# EAGLE board 6up-PA1 (EAGLE 9.4.2)
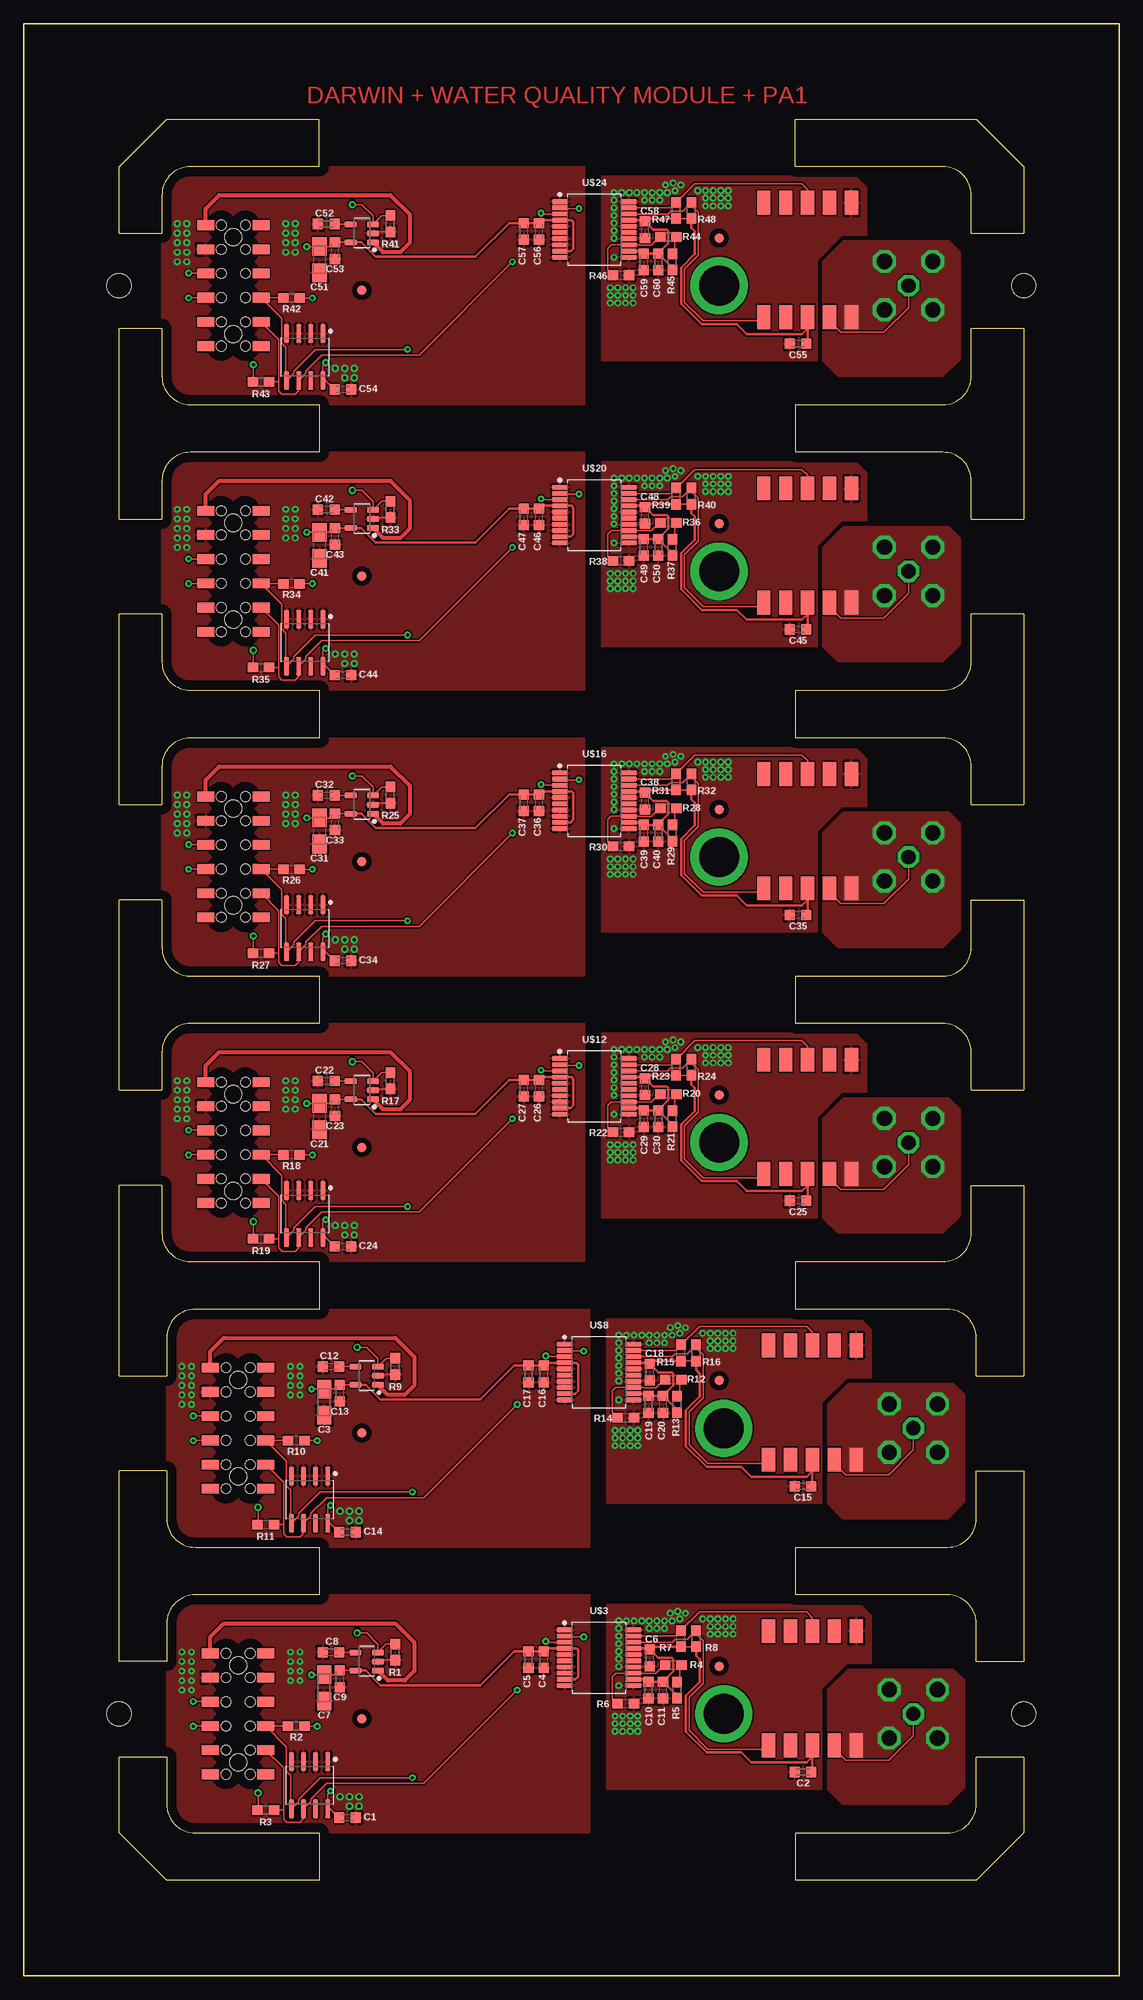
[diagram p0: board, top side]
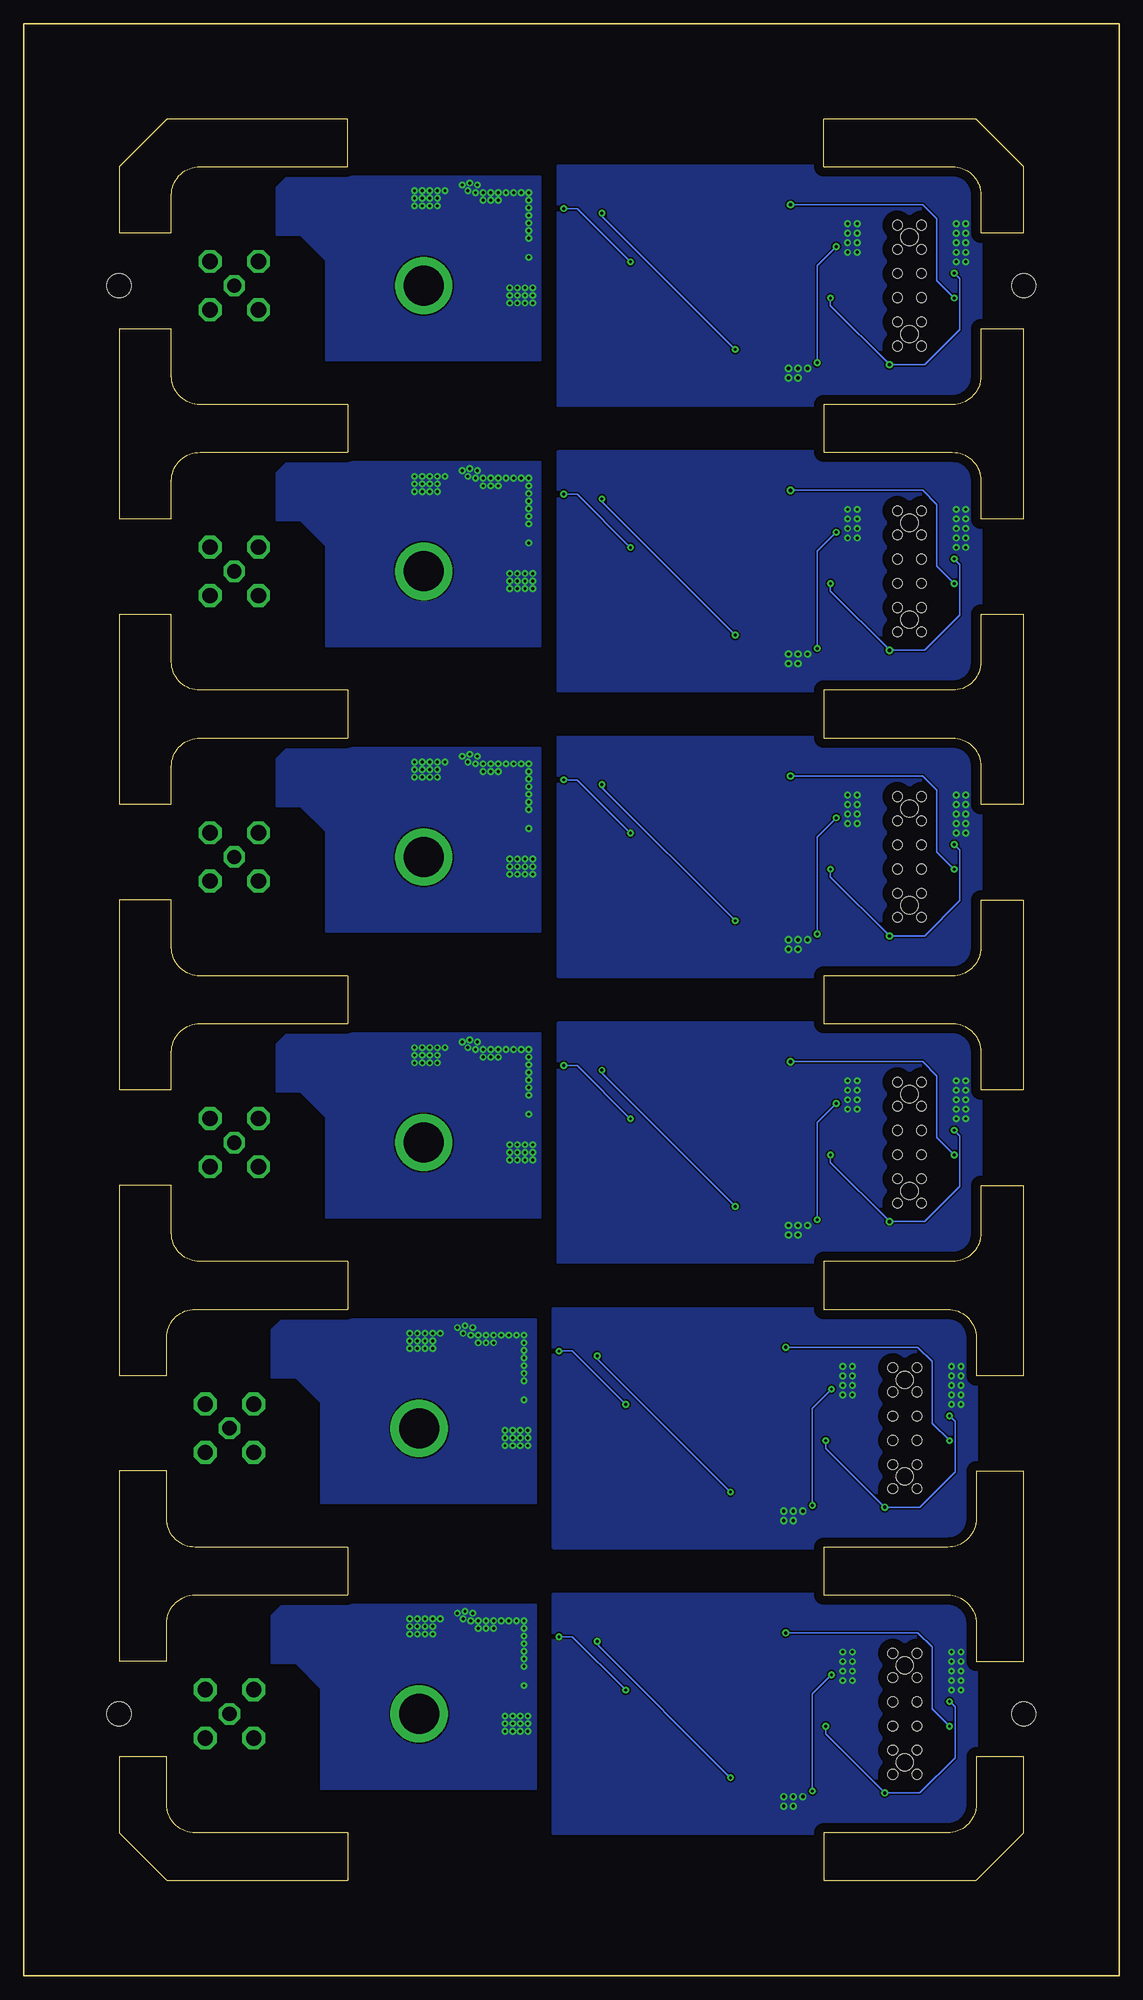
[diagram p1: board, bottom side, seen from below]

Size 115 x 205 mm. Coordinates in mm from the lower left corner, seen from the top.
Outline: 81,10 100,10 105,15 105,23 100,23 100,18 arc-90 97,15 81,15 81,10
Outline: 81,10 81,10
Outline: 15,18 arc90 18,15 31,15 31,10 15,10 10,15 10,23 15,23 15,18
Outline: 100,37 arc90 97,40 81,40 81,45 97,45 arc90 100,48 100,53 105,53 105,33 100,33 100,37
Outline: 18,40 arc90 15,37 15,33 10,33 10,53 15,53 15,48 arc90 18,45 31,45 31,40 18,40
Outline: 100,67 arc90 97,70 81,70 81,75 96.5,75 arc90 99.5,78 99.5,83 105,83 105,63 100,63 100,67
Outline: 18,70 arc90 15,67 15,63 10,63 10,83 14.5,83 14.5,78 arc90 17.5,75 31,75 31,70 18,70
Outline: 99.5,97 arc90 96.5,100 81,100 81,105 96.5,105 arc90 99.5,108 99.5,113 105,113 105,93 99.5,93 99.5,97
Outline: 17.5,100 arc90 14.5,97 14.5,93 10,93 10,113 14.5,113 14.5,108 arc90 17.5,105 31,105 31,100 17.5,100
Outline: 99.5,127 arc90 96.5,130 81,130 81,135 96.5,135 arc90 99.5,138 99.5,143 105,143 105,123 99.5,123 99.5,127
Outline: 17.5,130 arc90 14.5,127 14.5,123 10,123 10,143 14.5,143 14.5,138 arc90 17.5,135 31,135 31,130 17.5,130
Outline: 99.5,157 arc90 96.5,160 81,160 81,165 96.5,165 arc90 99.5,168 99.5,173 105,173 105,153 99.5,153 99.5,157
Outline: 17.5,160 arc90 14.5,157 14.5,153 10,153 10,173 14.5,173 14.5,168 arc90 17.5,165 31,165 31,160 17.5,160
Outline: 99.5,187 arc90 96.5,190 81,190 81,195 100,195 105,190 105,183 99.5,183 99.5,187
Outline: 17.5,190 arc90 14.5,187 14.5,183 10,183 10,190 15,195 31,195 31,190 17.5,190
Outline: 0,0 115,0 115,205 0,205 0,0
Copper layers (1*16): Top 0.035mm / dielectric 1.5mm / Bottom 0.035mm
Design rules "default *": minimum track width 6mil, minimum drill 0.35mm, track to track 6mil, track to pad 6mil, pad to pad 6mil, via to via 6mil, smd to smd 6mil, copper to edge 40mil, drill to drill 6mil, minimum pad ring 10mil, minimum via ring 8mil, stop-mask expansion 4mil, vias tented up to drill 0.35mm, thermal gap 10mil
Holes 2.54 mm at 10,177.5 105,177.5 10,27.5 105,27.5

## Footprints (pad centres in the part's own frame; a part is rotated, then mirrored left to right if it is on the bottom)
C0603K = smd 1.05 x 1.08: 1 -0.875,0; 2 0.875,0
A/3216-18R = smd 1.95 x 1.5: + 1.375,0; - -1.375,0
FIDUCIAL_1MM = smd 1 x 1: 1 0,0
M20-7810645 = smd 1.02 x 1.78: P$1 -6.35,-2.91; P$2 -3.81,-2.91; P$3 -1.27,-2.91; P$4 1.27,-2.91; P$5 3.81,-2.91; P$6 6.35,-2.91; P$7 6.35,2.91; P$8 3.81,2.91; P$9 1.27,2.91; P$10 -1.27,2.91; P$11 -3.81,2.91; P$12 -6.35,2.91 | hole 1.02: -6.35,1.27; -3.81,1.27; -1.27,1.27; 1.27,1.27; 3.81,1.27; 6.35,1.27; 6.35,-1.27; 3.81,-1.27; 1.27,-1.27; -1.27,-1.27; -3.81,-1.27; -6.35,-1.27 | hole 1.8: -5.08,0; 5.08,0
0603 = smd 1.1 x 1: 1 -0.85,0; 2 0.85,0
SOIC127P600X175-8 = smd 1.968 x 0.569: 1 -2.473,1.905; 2 -2.473,0.635; 3 -2.473,-0.635; 4 -2.473,-1.905; 5 2.473,-1.905; 6 2.473,-0.635; 7 2.473,0.635; 8 2.473,1.905
5-1814832-1 = drill 1.6 octagon: G1 -2.54,2.54; G2 -2.54,-2.54; G3 2.54,-2.54; G4 2.54,2.54 | drill 1.5 octagon: PIN 0,0
ATLAS-10P = smd 2.5 x 1.4: PAD1 -6,5; PAD2 -6,2.7; PAD3 -6,0.4; PAD4 -6,-1.9; PAD5 -6,-4.2; PAD6 6,-4.2; PAD7 6,-1.9; PAD8 6,0.4; PAD9 6,2.7; PAD10 6,5
SOP65P780X200-20 = smd 1.702 x 0.475: 1 -3.603,2.925; 2 -3.603,2.275; 3 -3.603,1.625; 4 -3.603,0.975; 5 -3.603,0.325; 6 -3.603,-0.325; 7 -3.603,-0.975; 8 -3.603,-1.625; 9 -3.603,-2.275; 10 -3.603,-2.925; 11 3.603,-2.925; 12 3.603,-2.275; 13 3.603,-1.625; 14 3.603,-0.975; 15 3.603,-0.325; 16 3.603,0.325; 17 3.603,0.975; 18 3.603,1.625; 19 3.603,2.275; 20 3.603,2.925
SOT95P280X145-5 = smd 1.262 x 0.609: 1 -1.175,0.95; 2 -1.175,0; 3 -1.175,-0.95; 4 1.175,-0.95; 5 1.175,0.95

## Placement (x,y rotation side)
C1  .1uf  [C0603K]  34,16.6 0 top
C2  .1uf  [C0603K]  81.8,21.4 180 top
C3  6.8uf  [A/3216-18R]  31.54,60.23 90 top
C4  .1uf  [C0603K]  54.6,33.2 270 top
C5  10uf  [C0603K]  53,33.2 270 top
C6  .1uf  [C0603K]  65.73,33.38 270 top
C7  6.8uf  [A/3216-18R]  31.54,30.23 90 top
C8  [C0603K]  32.25,33.97 180 top
C9  .1uf  [C0603K]  33.17,31.18 270 top
C10  .1uf  [C0603K]  65.6,30 270 top
C11  10uf  [C0603K]  67.13,30 270 top
C12  [C0603K]  32.25,63.97 180 top
C13  .1uf  [C0603K]  33.17,61.17 270 top
C14  .1uf  [C0603K]  34,46.6 0 top
C15  .1uf  [C0603K]  81.8,51.4 180 top
C16  .1uf  [C0603K]  54.6,63.2 270 top
C17  10uf  [C0603K]  53,63.2 270 top
C18  .1uf  [C0603K]  65.73,63.38 270 top
C19  .1uf  [C0603K]  65.6,60 270 top
C20  10uf  [C0603K]  67.13,60 270 top
C21  6.8uf  [A/3216-18R]  31.04,90.23 90 top
C22  [C0603K]  31.75,93.97 180 top
C23  .1uf  [C0603K]  32.67,91.17 270 top
C24  .1uf  [C0603K]  33.5,76.6 0 top
C25  .1uf  [C0603K]  81.3,81.4 180 top
C26  .1uf  [C0603K]  54.1,93.2 270 top
C27  10uf  [C0603K]  52.5,93.2 270 top
C28  .1uf  [C0603K]  65.23,93.38 270 top
C29  .1uf  [C0603K]  65.1,90 270 top
C30  10uf  [C0603K]  66.63,90 270 top
C31  6.8uf  [A/3216-18R]  31.04,120.23 90 top
C32  [C0603K]  31.75,123.97 180 top
C33  .1uf  [C0603K]  32.67,121.17 270 top
C34  .1uf  [C0603K]  33.5,106.6 0 top
C35  .1uf  [C0603K]  81.3,111.4 180 top
C36  .1uf  [C0603K]  54.1,123.2 270 top
C37  10uf  [C0603K]  52.5,123.2 270 top
C38  .1uf  [C0603K]  65.23,123.38 270 top
C39  .1uf  [C0603K]  65.1,120 270 top
C40  10uf  [C0603K]  66.63,120 270 top
C41  6.8uf  [A/3216-18R]  31.04,150.23 90 top
C42  [C0603K]  31.75,153.97 180 top
C43  .1uf  [C0603K]  32.67,151.18 270 top
C44  .1uf  [C0603K]  33.5,136.6 0 top
C45  .1uf  [C0603K]  81.3,141.4 180 top
C46  .1uf  [C0603K]  54.1,153.2 270 top
C47  10uf  [C0603K]  52.5,153.2 270 top
C48  .1uf  [C0603K]  65.23,153.38 270 top
C49  .1uf  [C0603K]  65.1,150 270 top
C50  10uf  [C0603K]  66.63,150 270 top
C51  6.8uf  [A/3216-18R]  31.04,180.23 90 top
C52  [C0603K]  31.75,183.97 180 top
C53  .1uf  [C0603K]  32.67,181.18 270 top
C54  .1uf  [C0603K]  33.5,166.6 0 top
C55  .1uf  [C0603K]  81.3,171.4 180 top
C56  .1uf  [C0603K]  54.1,183.2 270 top
C57  10uf  [C0603K]  52.5,183.2 270 top
C58  .1uf  [C0603K]  65.23,183.38 270 top
C59  .1uf  [C0603K]  65.1,180 270 top
C60  10uf  [C0603K]  66.63,180 270 top
E$1  [FIDUCIAL_1MM]  35.5,177 0 top
E$2  [FIDUCIAL_1MM]  35.5,147 0 top
E$3  [FIDUCIAL_1MM]  73,182.5 0 top
E$4  [FIDUCIAL_1MM]  73,152.5 0 top
E$5  [FIDUCIAL_1MM]  35.5,117 0 top
E$6  [FIDUCIAL_1MM]  35.5,87 0 top
E$7  [FIDUCIAL_1MM]  35.5,57 0 top
E$8  [FIDUCIAL_1MM]  35.5,27 0 top
E$9  [FIDUCIAL_1MM]  73,122.5 0 top
E$10  [FIDUCIAL_1MM]  73,92.5 0 top
E$11  [FIDUCIAL_1MM]  73,62.5 0 top
E$12  [FIDUCIAL_1MM]  73,32.5 0 top
J1  2X6-HEADERS  [M20-7810645]  22.5,27.5 90 top
J2  2X6-HEADERS  [M20-7810645]  22.5,57.5 90 top
J3  2X6-HEADERS  [M20-7810645]  22,87.5 90 top
J4  2X6-HEADERS  [M20-7810645]  22,117.5 90 top
J5  2X6-HEADERS  [M20-7810645]  22,147.5 90 top
J6  2X6-HEADERS  [M20-7810645]  22,177.5 90 top
R1  100k  [0603]  39,34 90 top
R2  4.7k  [0603]  28.6,26.2 180 top
R3  4.7k  [0603]  25.4,17.4 0 top
R4  1.5k  [0603]  68.2,32.6 180 top
R5  1.5k  [0603]  68.6,30 90 top
R6  1.5k  [0603]  63.2,28.6 0 top
R7  4.7k  [0603]  69,35.4 90 top
R8  4.7k  [0603]  70.6,35.4 90 top
R9  100k  [0603]  39,64 90 top
R10  4.7k  [0603]  28.6,56.2 180 top
R11  4.7k  [0603]  25.4,47.4 0 top
R12  1.5k  [0603]  68.2,62.6 180 top
R13  1.5k  [0603]  68.6,60 90 top
R14  1.5k  [0603]  63.2,58.6 0 top
R15  4.7k  [0603]  69,65.4 90 top
R16  4.7k  [0603]  70.6,65.4 90 top
R17  100k  [0603]  38.5,94 90 top
R18  4.7k  [0603]  28.1,86.2 180 top
R19  4.7k  [0603]  24.9,77.4 0 top
R20  1.5k  [0603]  67.7,92.6 180 top
R21  1.5k  [0603]  68.1,90 90 top
R22  1.5k  [0603]  62.7,88.6 0 top
R23  4.7k  [0603]  68.5,95.4 90 top
R24  4.7k  [0603]  70.1,95.4 90 top
R25  100k  [0603]  38.5,124 90 top
R26  4.7k  [0603]  28.1,116.2 180 top
R27  4.7k  [0603]  24.9,107.4 0 top
R28  1.5k  [0603]  67.7,122.6 180 top
R29  1.5k  [0603]  68.1,120 90 top
R30  1.5k  [0603]  62.7,118.6 0 top
R31  4.7k  [0603]  68.5,125.4 90 top
R32  4.7k  [0603]  70.1,125.4 90 top
R33  100k  [0603]  38.5,154 90 top
R34  4.7k  [0603]  28.1,146.2 180 top
R35  4.7k  [0603]  24.9,137.4 0 top
R36  1.5k  [0603]  67.7,152.6 180 top
R37  1.5k  [0603]  68.1,150 90 top
R38  1.5k  [0603]  62.7,148.6 0 top
R39  4.7k  [0603]  68.5,155.4 90 top
R40  4.7k  [0603]  70.1,155.4 90 top
R41  100k  [0603]  38.5,184 90 top
R42  4.7k  [0603]  28.1,176.2 180 top
R43  4.7k  [0603]  24.9,167.4 0 top
R44  1.5k  [0603]  67.7,182.6 180 top
R45  1.5k  [0603]  68.1,180 90 top
R46  1.5k  [0603]  62.7,178.6 0 top
R47  4.7k  [0603]  68.5,185.4 90 top
R48  4.7k  [0603]  70.1,185.4 90 top
U1  M24C02-WMN6TP  [SOIC127P600X175-8]  30,50 270 top
U2  M24C02-WMN6TP  [SOIC127P600X175-8]  29.5,80 270 top
U3  M24C02-WMN6TP  [SOIC127P600X175-8]  30,20 270 top
U4  M24C02-WMN6TP  [SOIC127P600X175-8]  29.5,110 270 top
U5  M24C02-WMN6TP  [SOIC127P600X175-8]  29.5,140 270 top
U6  M24C02-WMN6TP  [SOIC127P600X175-8]  29.5,170 270 top
U$1  5-1814832-1  [5-1814832-1]  93.4,27.5 0 top
U$2  ATLAS10P  [ATLAS-10P]  83.2,30.2 90 top
U$3  ADM3260  [SOP65P780X200-20]  60.4,33.4 0 top
U$4  MIC5219-3.3YM5-TR  [SOT95P280X145-5]  36,33 180 top
U$5  MIC5219-3.3YM5-TR  [SOT95P280X145-5]  36,63 180 top
U$6  5-1814832-1  [5-1814832-1]  93.4,57.5 0 top
U$7  ATLAS10P  [ATLAS-10P]  83.2,60.2 90 top
U$8  ADM3260  [SOP65P780X200-20]  60.4,63.4 0 top
U$9  MIC5219-3.3YM5-TR  [SOT95P280X145-5]  35.5,93 180 top
U$10  5-1814832-1  [5-1814832-1]  92.9,87.5 0 top
U$11  ATLAS10P  [ATLAS-10P]  82.7,90.2 90 top
U$12  ADM3260  [SOP65P780X200-20]  59.9,93.4 0 top
U$13  MIC5219-3.3YM5-TR  [SOT95P280X145-5]  35.5,123 180 top
U$14  5-1814832-1  [5-1814832-1]  92.9,117.5 0 top
U$15  ATLAS10P  [ATLAS-10P]  82.7,120.2 90 top
U$16  ADM3260  [SOP65P780X200-20]  59.9,123.4 0 top
U$17  MIC5219-3.3YM5-TR  [SOT95P280X145-5]  35.5,153 180 top
U$18  5-1814832-1  [5-1814832-1]  92.9,147.5 0 top
U$19  ATLAS10P  [ATLAS-10P]  82.7,150.2 90 top
U$20  ADM3260  [SOP65P780X200-20]  59.9,153.4 0 top
U$21  MIC5219-3.3YM5-TR  [SOT95P280X145-5]  35.5,183 180 top
U$22  5-1814832-1  [5-1814832-1]  92.9,177.5 0 top
U$23  ATLAS10P  [ATLAS-10P]  82.7,180.2 90 top
U$24  ADM3260  [SOP65P780X200-20]  59.9,183.4 0 top

## Library data of the parts
C1-C60 = rcl; SPICEPREFIX: C
E$1-E$12 = microbuilder
J1-J6 U1-U6 U$1-U$24 = Conservify
R1-R48 = SparkFun-Resistors; PROD_ID: RES-07828

## Nets
3V1: C3.+ C13.1 C14.1 C16.1 C17.1 U1.8 U$5.5 U$8.4 U$8.9
3V2: C21.+ C23.1 C24.1 C26.1 C27.1 U2.8 U$9.5 U$12.4 U$12.9
3V3: C1.1 C4.1 C5.1 C7.+ C9.1 U3.8 U$3.4 U$3.9 U$4.5
3V4: C31.+ C33.1 C34.1 C36.1 C37.1 U4.8 U$13.5 U$16.4 U$16.9
3V5: C41.+ C43.1 C44.1 C46.1 C47.1 U5.8 U$17.5 U$20.4 U$20.9
3V6: C51.+ C53.1 C54.1 C56.1 C57.1 U6.8 U$21.5 U$24.4 U$24.9
ENABLE: J1.P$10 R1.2 U$4.3
ENABLE1: J2.P$10 R9.2 U$5.3
ENABLE2: J3.P$10 R17.2 U$9.3
ENABLE3: J4.P$10 R25.2 U$13.3
ENABLE4: J5.P$10 R33.2 U$17.3
ENABLE5: J6.P$10 R41.2 U$21.3
G1: J1.P$11
G2: J1.P$12
G3: J2.P$11
G4: J2.P$12
G5: J3.P$11
G6: J3.P$12
G7: J4.P$11
G8: J4.P$12
G9: J5.P$11
G10: J5.P$12
G11: J6.P$11
G12: J6.P$12
GND: C1.2 C4.2 C5.2 C7.- C8.2 C9.2 J1.P$8 R1.1 U3.1 U3.2 U3.3 U3.4 U$3.1 U$3.5 U$3.7 U$3.8 U$3.10 U$4.2
GND1: C3.- C12.2 C13.2 C14.2 C16.2 C17.2 J2.P$8 R9.1 U1.1 U1.2 U1.3 U1.4 U$5.2 U$8.1 U$8.5 U$8.7 U$8.8 U$8.10
GND2: C21.- C22.2 C23.2 C24.2 C26.2 C27.2 J3.P$8 R17.1 U2.1 U2.2 U2.3 U2.4 U$9.2 U$12.1 U$12.5 U$12.7 U$12.8 U$12.10
GND3: C31.- C32.2 C33.2 C34.2 C36.2 C37.2 J4.P$8 R25.1 U4.1 U4.2 U4.3 U4.4 U$13.2 U$16.1 U$16.5 U$16.7 U$16.8 U$16.10
GND4: C41.- C42.2 C43.2 C44.2 C46.2 C47.2 J5.P$8 R33.1 U5.1 U5.2 U5.3 U5.4 U$17.2 U$20.1 U$20.5 U$20.7 U$20.8 U$20.10
GND5: C51.- C52.2 C53.2 C54.2 C56.2 C57.2 J6.P$8 R41.1 U6.1 U6.2 U6.3 U6.4 U$21.2 U$24.1 U$24.5 U$24.7 U$24.8 U$24.10
I3V1: C15.1 C18.1 C19.1 C20.1 R13.1 R15.1 R16.1 U$7.PAD3 U$8.12 U$8.17
I3V2: C25.1 C28.1 C29.1 C30.1 R21.1 R23.1 R24.1 U$11.PAD3 U$12.12 U$12.17
I3V3: C2.1 C6.1 C10.1 C11.1 R5.1 R7.1 R8.1 U$2.PAD3 U$3.12 U$3.17
I3V4: C35.1 C38.1 C39.1 C40.1 R29.1 R31.1 R32.1 U$15.PAD3 U$16.12 U$16.17
I3V5: C45.1 C48.1 C49.1 C50.1 R37.1 R39.1 R40.1 U$19.PAD3 U$20.12 U$20.17
I3V6: C55.1 C58.1 C59.1 C60.1 R45.1 R47.1 R48.1 U$23.PAD3 U$24.12 U$24.17
IGND: C2.2 C6.2 C10.2 C11.2 R6.2 U$2.PAD6 U$3.11 U$3.14 U$3.16 U$3.20
IGND1: C15.2 C18.2 C19.2 C20.2 R14.2 U$7.PAD6 U$8.11 U$8.14 U$8.16 U$8.20
IGND2: C25.2 C28.2 C29.2 C30.2 R22.2 U$11.PAD6 U$12.11 U$12.14 U$12.16 U$12.20
IGND3: C35.2 C38.2 C39.2 C40.2 R30.2 U$15.PAD6 U$16.11 U$16.14 U$16.16 U$16.20
IGND4: C45.2 C48.2 C49.2 C50.2 R38.2 U$19.PAD6 U$20.11 U$20.14 U$20.16 U$20.20
IGND5: C55.2 C58.2 C59.2 C60.2 R46.2 U$23.PAD6 U$24.11 U$24.14 U$24.16 U$24.20
IN3V1: J2.P$9 R10.1 R11.1
IN3V2: J3.P$9 R18.1 R19.1
IN3V3: J1.P$9 R2.1 R3.1
IN3V4: J4.P$9 R26.1 R27.1
IN3V5: J5.P$9 R34.1 R35.1
IN3V6: J6.P$9 R42.1 R43.1
ISCL: R7.2 U$2.PAD8 U$3.19
ISCL1: R15.2 U$7.PAD8 U$8.19
ISCL2: R23.2 U$11.PAD8 U$12.19
ISCL3: R31.2 U$15.PAD8 U$16.19
ISCL4: R39.2 U$19.PAD8 U$20.19
ISCL5: R47.2 U$23.PAD8 U$24.19
ISDA: R8.2 U$2.PAD1 U$3.18
ISDA1: R16.2 U$7.PAD1 U$8.18
ISDA2: R24.2 U$11.PAD1 U$12.18
ISDA3: R32.2 U$15.PAD1 U$16.18
ISDA4: R40.2 U$19.PAD1 U$20.18
ISDA5: R48.2 U$23.PAD1 U$24.18
MISO: J1.P$4
MISO1: J2.P$4
MISO2: J3.P$4
MISO3: J4.P$4
MISO4: J5.P$4
MISO5: J6.P$4
MOSI: J1.P$5
MOSI1: J2.P$5
MOSI2: J3.P$5
MOSI3: J4.P$5
MOSI4: J5.P$5
MOSI5: J6.P$5
N$2: U$1.PIN U$2.PAD4
N$3: R4.1 R5.2
N$5: C12.1 U$5.4
N$6: C8.1 U$4.4
N$7: U$6.PIN U$7.PAD4
N$8: R12.1 R13.2
N$10: C22.1 U$9.4
N$11: U$10.PIN U$11.PAD4
N$12: R20.1 R21.2
N$14: C32.1 U$13.4
N$15: U$14.PIN U$15.PAD4
N$16: R28.1 R29.2
N$18: C42.1 U$17.4
N$19: U$18.PIN U$19.PAD4
N$20: R36.1 R37.2
N$22: C52.1 U$21.4
N$23: U$22.PIN U$23.PAD4
N$24: R44.1 R45.2
NC: J1.P$1
NC1: J2.P$1
NC2: J3.P$1
NC3: J4.P$1
NC4: J5.P$1
NC5: J6.P$1
PG: U$1.G1 U$1.G2 U$1.G3 U$1.G4 U$2.PAD5
PG1: U$6.G1 U$6.G2 U$6.G3 U$6.G4 U$7.PAD5
PG2: U$10.G1 U$10.G2 U$10.G3 U$10.G4 U$11.PAD5
PG3: U$14.G1 U$14.G2 U$14.G3 U$14.G4 U$15.PAD5
PG4: U$18.G1 U$18.G2 U$18.G3 U$18.G4 U$19.PAD5
PG5: U$22.G1 U$22.G2 U$22.G3 U$22.G4 U$23.PAD5
SCK: J1.P$6
SCK1: J2.P$6
SCK2: J3.P$6
SCK3: J4.P$6
SCK4: J5.P$6
SCK5: J6.P$6
SCL: J1.P$2 R3.2 U3.6 U$3.2
SCL1: J2.P$2 R11.2 U1.6 U$8.2
SCL2: J3.P$2 R19.2 U2.6 U$12.2
SCL3: J4.P$2 R27.2 U4.6 U$16.2
SCL4: J5.P$2 R35.2 U5.6 U$20.2
SCL5: J6.P$2 R43.2 U6.6 U$24.2
SDA: J1.P$3 R2.2 U3.5 U$3.3
SDA1: J2.P$3 R10.2 U1.5 U$8.3
SDA2: J3.P$3 R18.2 U2.5 U$12.3
SDA3: J4.P$3 R26.2 U4.5 U$16.3
SDA4: J5.P$3 R34.2 U5.5 U$20.3
SDA5: J6.P$3 R42.2 U6.5 U$24.3
UNREG: J1.P$7 U$4.1
UNREG1: J2.P$7 U$5.1
UNREG2: J3.P$7 U$9.1
UNREG3: J4.P$7 U$13.1
UNREG4: J5.P$7 U$17.1
UNREG5: J6.P$7 U$21.1
VSEL: R4.2 R6.1 U$3.13
VSEL1: R12.2 R14.1 U$8.13
VSEL2: R20.2 R22.1 U$12.13
VSEL3: R28.2 R30.1 U$16.13
VSEL4: R36.2 R38.1 U$20.13
VSEL5: R44.2 R46.1 U$24.13
WC: U3.7
WC1: U1.7
WC2: U2.7
WC3: U4.7
WC4: U5.7
WC5: U6.7

## Tracks (layer width: path | path; a pad name or v marks a point on that pad's centre or on a via)
3V1  (via drill 0.3)
  Top 0.152: 34.95,62.05 U$5.5 C13.1 32.73,61.61 C3.+ v30.21,61.61 v30.2,61.6 | C14.1 32.2,47.53 | 32.2,47.53 32,47.73 | 32.2,47.53 U1.8 31.91,49.1 v32.2,49.4
  Top 0.254: U$8.9 57.92,61.12 58.2,61.4 58.2,64.2 58.02,64.38 U$8.4 54.9,64.38 C16.1 C17.1 51.48,64.08 47.92,60.52 37.45,60.52 35.92,62.05 U$5.5
  Bottom 0.152: v32.2,49.4 32.2,59.6 v30.2,61.6
3V2  (via drill 0.3)
  Top 0.152: 34.45,92.05 U$9.5 C23.1 32.23,91.61 C21.+ v29.71,91.61 v29.7,91.6 | C24.1 31.7,77.53 | 31.7,77.53 31.5,77.73 | 31.7,77.53 U2.8 31.41,79.11 v31.7,79.4
  Top 0.254: U$12.9 57.42,91.12 57.7,91.4 57.7,94.2 57.52,94.38 U$12.4 54.4,94.38 C26.1 C27.1 50.98,94.08 47.42,90.52 36.95,90.52 35.42,92.05 U$9.5
  Bottom 0.152: v31.7,79.4 31.7,89.6 v29.7,91.6
3V3  (via drill 0.3)
  Top 0.152: 34.95,32.05 U$4.5 C9.1 32.73,31.61 C7.+ v30.21,31.61 v30.2,31.6 | C1.1 32.2,17.53 | 32.2,17.53 32,17.73 | 32.2,17.53 U3.8 31.91,19.11 v32.2,19.4
  Top 0.254: U$3.9 57.92,31.12 58.2,31.4 58.2,34.2 58.02,34.38 U$3.4 54.9,34.38 C4.1 C5.1 51.48,34.08 47.92,30.52 37.45,30.52 35.92,32.05 U$4.5
  Bottom 0.152: v32.2,19.4 32.2,29.6 v30.2,31.6
3V4  (via drill 0.3)
  Top 0.152: 34.45,122.05 U$13.5 C33.1 32.23,121.61 C31.+ v29.71,121.61 v29.7,121.6 | C34.1 31.7,107.53 | 31.7,107.53 31.5,107.73 | 31.7,107.53 U4.8 31.41,109.11 v31.7,109.4
  Top 0.254: U$16.9 57.42,121.12 57.7,121.4 57.7,124.2 57.52,124.38 U$16.4 54.4,124.38 C36.1 C37.1 50.98,124.08 47.42,120.52 36.95,120.52 35.42,122.05 U$13.5
  Bottom 0.152: v31.7,109.4 31.7,119.6 v29.7,121.6
3V5  (via drill 0.3)
  Top 0.152: 34.45,152.05 U$17.5 C43.1 32.23,151.61 C41.+ v29.71,151.61 v29.7,151.6 | C44.1 31.7,137.53 | 31.7,137.53 31.5,137.73 | 31.7,137.53 U5.8 31.41,139.1 v31.7,139.4
  Top 0.254: U$20.9 57.42,151.12 57.7,151.4 57.7,154.2 57.52,154.38 U$20.4 54.4,154.38 C46.1 C47.1 50.98,154.07 47.42,150.52 36.95,150.52 35.42,152.05 U$17.5
  Bottom 0.152: v31.7,139.4 31.7,149.6 v29.7,151.6
3V6  (via drill 0.3)
  Top 0.152: 34.45,182.05 U$21.5 C53.1 32.23,181.61 C51.+ v29.71,181.61 v29.7,181.6 | C54.1 31.7,167.53 | 31.7,167.53 31.5,167.73 | 31.7,167.53 U6.8 31.41,169.1 v31.7,169.4
  Top 0.254: U$24.9 57.42,181.12 57.7,181.4 57.7,184.2 57.52,184.38 U$24.4 54.4,184.38 C56.1 C57.1 50.98,184.07 47.42,180.52 36.95,180.52 35.42,182.05 U$21.5
  Bottom 0.152: v31.7,169.4 31.7,179.6 v29.7,181.6
ENABLE  (via drill 0.3, 0.35)
  Top 0.152: R1.2 38.08,34.85 U$4.3 37.17,34.83 36,36 v35,36 | v17.8,26.2 17.83,26.23 J1.P$10
  Bottom 0.152: v35,36 21.11,36 19.63,34.51 19.63,28.03 v17.8,26.2
ENABLE1  (via drill 0.3, 0.35)
  Top 0.152: R9.2 38.08,64.85 U$5.3 37.17,64.83 36,66 v35,66 | v17.8,56.2 17.83,56.23 J2.P$10
  Bottom 0.152: v35,66 21.11,66 19.63,64.51 19.63,58.03 v17.8,56.2
ENABLE2  (via drill 0.3, 0.35)
  Top 0.152: R17.2 37.58,94.85 U$9.3 36.67,94.83 35.5,96 v34.5,96 | v17.3,86.2 17.33,86.23 J3.P$10
  Bottom 0.152: v34.5,96 20.61,96 19.13,94.51 19.13,88.03 v17.3,86.2
ENABLE3  (via drill 0.3, 0.35)
  Top 0.152: R25.2 37.58,124.85 U$13.3 36.67,124.83 35.5,126 v34.5,126 | v17.3,116.2 17.33,116.23 J4.P$10
  Bottom 0.152: v34.5,126 20.61,126 19.13,124.51 19.13,118.03 v17.3,116.2
ENABLE4  (via drill 0.3, 0.35)
  Top 0.152: R33.2 37.58,154.85 U$17.3 36.67,154.82 35.5,156 v34.5,156 | v17.3,146.2 17.33,146.23 J5.P$10
  Bottom 0.152: v34.5,156 20.61,156 19.13,154.51 19.13,148.03 v17.3,146.2
ENABLE5  (via drill 0.3, 0.35)
  Top 0.152: R41.2 37.58,184.85 U$21.3 36.67,184.82 35.5,186 v34.5,186 | v17.3,176.2 17.33,176.23 J6.P$10
  Bottom 0.152: v34.5,186 20.61,186 19.13,184.51 19.13,178.03 v17.3,176.2
GND  (via drill 0.3, 0.35)
  Top 0.152: U$4.2 37.33,33.15 R1.1
  other vias: 28,34 29,34 29,33 28,33 29,32 28,32 29,31 16.6,34 16.6,33 16.6,32 16.6,31 16.6,30 17.6,34 17.6,33 17.6,32 17.6,31 17.6,30 35.2,18.8 33.2,18.8 34.2,18.8 34.2,17.8 35.2,17.8 28,31
  pour Top: 15,40 59.4,40 59.4,15 15,15
  pour Bottom: 15,40 59.4,40 59.4,15 15,15
GND1  (via drill 0.3, 0.35)
  Top 0.152: U$5.2 37.33,63.15 R9.1
  other vias: 28,64 29,64 29,63 28,63 29,62 28,62 29,61 16.6,64 16.6,63 16.6,62 16.6,61 16.6,60 17.6,64 17.6,63 17.6,62 17.6,61 17.6,60 35.2,48.8 33.2,48.8 34.2,48.8 34.2,47.8 35.2,47.8 28,61
  pour Top: 15,70 59.4,70 59.4,45 15,45
  pour Bottom: 15,70 59.4,70 59.4,45 15,45
GND2  (via drill 0.3, 0.35)
  Top 0.152: U$9.2 36.83,93.15 R17.1
  other vias: 27.5,94 28.5,94 28.5,93 27.5,93 28.5,92 27.5,92 28.5,91 16.1,94 16.1,93 16.1,92 16.1,91 16.1,90 17.1,94 17.1,93 17.1,92 17.1,91 17.1,90 34.7,78.8 32.7,78.8 33.7,78.8 33.7,77.8 34.7,77.8 27.5,91
  pour Top: 14.5,100 58.9,100 58.9,75 14.5,75
  pour Bottom: 14.5,100 58.9,100 58.9,75 14.5,75
GND3  (via drill 0.3, 0.35)
  Top 0.152: U$13.2 36.83,123.15 R25.1
  other vias: 27.5,124 28.5,124 28.5,123 27.5,123 28.5,122 27.5,122 28.5,121 16.1,124 16.1,123 16.1,122 16.1,121 16.1,120 17.1,124 17.1,123 17.1,122 17.1,121 17.1,120 34.7,108.8 32.7,108.8 33.7,108.8 33.7,107.8 34.7,107.8 27.5,121
  pour Top: 14.5,130 58.9,130 58.9,105 14.5,105
  pour Bottom: 14.5,130 58.9,130 58.9,105 14.5,105
GND4  (via drill 0.3, 0.35)
  Top 0.152: U$17.2 36.83,153.15 R33.1
  other vias: 27.5,154 28.5,154 28.5,153 27.5,153 28.5,152 27.5,152 28.5,151 16.1,154 16.1,153 16.1,152 16.1,151 16.1,150 17.1,154 17.1,153 17.1,152 17.1,151 17.1,150 34.7,138.8 32.7,138.8 33.7,138.8 33.7,137.8 34.7,137.8 27.5,151
  pour Top: 14.5,160 58.9,160 58.9,135 14.5,135
  pour Bottom: 14.5,160 58.9,160 58.9,135 14.5,135
GND5  (via drill 0.3, 0.35)
  Top 0.152: U$21.2 36.83,183.15 R41.1
  other vias: 27.5,184 28.5,184 28.5,183 27.5,183 28.5,182 27.5,182 28.5,181 16.1,184 16.1,183 16.1,182 16.1,181 16.1,180 17.1,184 17.1,183 17.1,182 17.1,181 17.1,180 34.7,168.8 32.7,168.8 33.7,168.8 33.7,167.8 34.7,167.8 27.5,181
  pour Top: 14.5,190 58.9,190 58.9,165 14.5,165
  pour Bottom: 14.5,190 58.9,190 58.9,165 14.5,165
I3V1
  Top 0.152: 68.83,64.38 R15.1 R16.1
  Top 0.254: R16.1 70.6,63.6 70.97,63.23 70.97,60.84 69.52,59.38 69.52,55.62 71.69,53.44 75.36,53.44 76.4,52.4 82.2,52.4 82.8,53 U$7.PAD3 82.8,51.52 C15.1 | U$8.12 65.35,61.12 C19.1 C20.1 | C18.1 66.6,63.38 68.02,63.38 68.18,63.22 68.18,61.98 67.13,60.93 C20.1 | C20.1 68.6,59.4 R13.1 | U$8.17 65.61,64.38 C18.1 | C18.1 66.03,64.55 R15.1
I3V2
  Top 0.152: 68.33,94.38 R23.1 R24.1
  Top 0.254: R24.1 70.1,93.6 70.47,93.23 70.47,90.84 69.02,89.39 69.02,85.61 71.19,83.44 74.86,83.44 75.9,82.4 81.7,82.4 82.3,83 U$11.PAD3 82.3,81.53 C25.1 | U$12.12 64.85,91.12 C29.1 C30.1 | C28.1 66.1,93.38 67.52,93.38 67.68,93.22 67.68,91.98 66.63,90.93 C30.1 | C30.1 68.1,89.4 R21.1 | U$12.17 65.11,94.38 C28.1 | C28.1 65.53,94.55 R23.1
I3V3
  Top 0.152: 68.83,34.38 R7.1 R8.1
  Top 0.254: R8.1 70.6,33.6 70.97,33.23 70.97,30.84 69.52,29.39 69.52,25.61 71.69,23.44 75.36,23.44 76.4,22.4 82.2,22.4 82.8,23 U$2.PAD3 82.8,21.52 C2.1 | U$3.12 65.35,31.12 C10.1 C11.1 | C6.1 66.6,33.38 68.02,33.38 68.18,33.22 68.18,31.98 67.13,30.93 C11.1 | C11.1 68.6,29.4 R5.1 | U$3.17 65.61,34.38 C6.1 | C6.1 66.03,34.55 R7.1
I3V4
  Top 0.152: 68.33,124.38 R31.1 R32.1
  Top 0.254: R32.1 70.1,123.6 70.47,123.23 70.47,120.84 69.02,119.39 69.02,115.61 71.19,113.44 74.86,113.44 75.9,112.4 81.7,112.4 82.3,113 U$15.PAD3 82.3,111.53 C35.1 | U$16.12 64.85,121.12 C39.1 C40.1 | C38.1 66.1,123.38 67.52,123.38 67.68,123.22 67.68,121.98 66.63,120.93 C40.1 | C40.1 68.1,119.4 R29.1 | U$16.17 65.11,124.38 C38.1 | C38.1 65.53,124.55 R31.1
I3V5
  Top 0.152: 68.33,154.38 R39.1 R40.1
  Top 0.254: R40.1 70.1,153.6 70.47,153.23 70.47,150.84 69.02,149.38 69.02,145.62 71.19,143.44 74.86,143.44 75.9,142.4 81.7,142.4 82.3,143 U$19.PAD3 82.3,141.53 C45.1 | U$20.12 64.85,151.12 C49.1 C50.1 | C48.1 66.1,153.38 67.52,153.38 67.68,153.22 67.68,151.98 66.63,150.93 C50.1 | C50.1 68.1,149.4 R37.1 | U$20.17 65.11,154.38 C48.1 | C48.1 65.53,154.55 R39.1
I3V6
  Top 0.152: 68.33,184.38 R47.1 R48.1
  Top 0.254: R48.1 70.1,183.6 70.47,183.23 70.47,180.84 69.02,179.38 69.02,175.62 71.19,173.44 74.86,173.44 75.9,172.4 81.7,172.4 82.3,173 U$23.PAD3 82.3,171.53 C55.1 | U$24.12 64.85,181.12 C59.1 C60.1 | C58.1 66.1,183.38 67.52,183.38 67.68,183.22 67.68,181.98 66.63,180.93 C60.1 | C60.1 68.1,179.4 R45.1 | U$24.17 65.11,184.38 C58.1 | C58.1 65.53,184.55 R47.1
IGND  (via drill 0.3)
  other vias: 62.47,30.47 62.47,32.47 62.47,33.27 62.47,34.07 62.47,34.87 62.47,35.67 62.47,36.47 62.07,27.27 62.87,27.27 63.67,27.27 64.47,27.27 62.07,26.47 62.87,26.47 63.67,26.47 62.07,25.67 64.47,26.47 63.27,37.27 64.07,37.27 64.87,37.27 65.67,36.47 66.47,36.47 67.27,36.47 65.67,37.27 66.47,37.27 67.27,37.27 62.47,37.27 68.07,37.27 68.87,37.47 68.67,38.27 69.47,38.07 67.87,38.07 71.27,37.47 72.07,37.47 72.87,37.47 73.67,37.47 74.47,37.47 72.07,36.67 72.87,36.67 73.67,36.67 74.47,36.67 72.07,35.87 72.87,35.87 73.67,35.87 74.47,35.87 62.87,25.67 63.67,25.67 64.47,25.67
  pour Bottom: 61.2,19.6 61.2,39 87.8,39 89,37.8 89,32.8 86.4,32.8 83.8,30.2 83.8,19.6
  pour Top: 89,32.8 89,37.8 87.8,39 61.2,39 61.2,19.6 83.8,19.6 83.8,30.2 86.4,32.8
IGND1  (via drill 0.3)
  other vias: 62.47,60.47 62.47,62.47 62.47,63.27 62.47,64.07 62.47,64.87 62.47,65.67 62.47,66.47 62.07,57.27 62.87,57.27 63.67,57.27 64.47,57.27 62.07,56.47 62.87,56.47 63.67,56.47 62.07,55.67 64.47,56.47 63.27,67.27 64.07,67.27 64.87,67.27 65.67,66.47 66.47,66.47 67.27,66.47 65.67,67.27 66.47,67.27 67.27,67.27 62.47,67.27 68.07,67.27 68.87,67.47 68.67,68.27 69.47,68.07 67.87,68.07 71.27,67.47 72.07,67.47 72.87,67.47 73.67,67.47 74.47,67.47 72.07,66.67 72.87,66.67 73.67,66.67 74.47,66.67 72.07,65.87 72.87,65.87 73.67,65.87 74.47,65.87 62.87,55.67 63.67,55.67 64.47,55.67
  pour Bottom: 61.2,49.6 61.2,69 87.8,69 89,67.8 89,62.8 86.4,62.8 83.8,60.2 83.8,49.6
  pour Top: 89,62.8 89,67.8 87.8,69 61.2,69 61.2,49.6 83.8,49.6 83.8,60.2 86.4,62.8
IGND2  (via drill 0.3)
  other vias: 61.97,90.47 61.97,92.47 61.97,93.27 61.97,94.07 61.97,94.87 61.97,95.67 61.97,96.47 61.57,87.27 62.37,87.27 63.17,87.27 63.97,87.27 61.57,86.47 62.37,86.47 63.17,86.47 61.57,85.67 63.97,86.47 62.77,97.27 63.57,97.27 64.37,97.27 65.17,96.47 65.97,96.47 66.77,96.47 65.17,97.27 65.97,97.27 66.77,97.27 61.97,97.27 67.57,97.27 68.37,97.47 68.17,98.27 68.97,98.07 67.37,98.07 70.77,97.47 71.57,97.47 72.37,97.47 73.17,97.47 73.97,97.47 71.57,96.67 72.37,96.67 73.17,96.67 73.97,96.67 71.57,95.87 72.37,95.87 73.17,95.87 73.97,95.87 62.37,85.67 63.17,85.67 63.97,85.67
  pour Bottom: 60.7,79.6 60.7,99 87.3,99 88.5,97.8 88.5,92.8 85.9,92.8 83.3,90.2 83.3,79.6
  pour Top: 88.5,92.8 88.5,97.8 87.3,99 60.7,99 60.7,79.6 83.3,79.6 83.3,90.2 85.9,92.8
IGND3  (via drill 0.3)
  other vias: 61.97,120.47 61.97,122.47 61.97,123.27 61.97,124.07 61.97,124.87 61.97,125.67 61.97,126.47 61.57,117.27 62.37,117.27 63.17,117.27 63.97,117.27 61.57,116.47 62.37,116.47 63.17,116.47 61.57,115.67 63.97,116.47 62.77,127.27 63.57,127.27 64.37,127.27 65.17,126.47 65.97,126.47 66.77,126.47 65.17,127.27 65.97,127.27 66.77,127.27 61.97,127.27 67.57,127.27 68.37,127.47 68.17,128.27 68.97,128.07 67.37,128.07 70.77,127.47 71.57,127.47 72.37,127.47 73.17,127.47 73.97,127.47 71.57,126.67 72.37,126.67 73.17,126.67 73.97,126.67 71.57,125.87 72.37,125.87 73.17,125.87 73.97,125.87 62.37,115.67 63.17,115.67 63.97,115.67
  pour Bottom: 60.7,109.6 60.7,129 87.3,129 88.5,127.8 88.5,122.8 85.9,122.8 83.3,120.2 83.3,109.6
  pour Top: 88.5,122.8 88.5,127.8 87.3,129 60.7,129 60.7,109.6 83.3,109.6 83.3,120.2 85.9,122.8
IGND4  (via drill 0.3)
  other vias: 61.97,150.47 61.97,152.47 61.97,153.27 61.97,154.07 61.97,154.87 61.97,155.67 61.97,156.47 61.57,147.27 62.37,147.27 63.17,147.27 63.97,147.27 61.57,146.47 62.37,146.47 63.17,146.47 61.57,145.67 63.97,146.47 62.77,157.27 63.57,157.27 64.37,157.27 65.17,156.47 65.97,156.47 66.77,156.47 65.17,157.27 65.97,157.27 66.77,157.27 61.97,157.27 67.57,157.27 68.37,157.47 68.17,158.27 68.97,158.07 67.37,158.07 70.77,157.47 71.57,157.47 72.37,157.47 73.17,157.47 73.97,157.47 71.57,156.67 72.37,156.67 73.17,156.67 73.97,156.67 71.57,155.87 72.37,155.87 73.17,155.87 73.97,155.87 62.37,145.67 63.17,145.67 63.97,145.67
  pour Bottom: 60.7,139.6 60.7,159 87.3,159 88.5,157.8 88.5,152.8 85.9,152.8 83.3,150.2 83.3,139.6
  pour Top: 88.5,152.8 88.5,157.8 87.3,159 60.7,159 60.7,139.6 83.3,139.6 83.3,150.2 85.9,152.8
IGND5  (via drill 0.3)
  other vias: 61.97,180.47 61.97,182.47 61.97,183.27 61.97,184.07 61.97,184.87 61.97,185.67 61.97,186.47 61.57,177.27 62.37,177.27 63.17,177.27 63.97,177.27 61.57,176.47 62.37,176.47 63.17,176.47 61.57,175.67 63.97,176.47 62.77,187.27 63.57,187.27 64.37,187.27 65.17,186.47 65.97,186.47 66.77,186.47 65.17,187.27 65.97,187.27 66.77,187.27 61.97,187.27 67.57,187.27 68.37,187.47 68.17,188.27 68.97,188.07 67.37,188.07 70.77,187.47 71.57,187.47 72.37,187.47 73.17,187.47 73.97,187.47 71.57,186.67 72.37,186.67 73.17,186.67 73.97,186.67 71.57,185.87 72.37,185.87 73.17,185.87 73.97,185.87 62.37,175.67 63.17,175.67 63.97,175.67
  pour Bottom: 60.7,169.6 60.7,189 87.3,189 88.5,187.8 88.5,182.8 85.9,182.8 83.3,180.2 83.3,169.6
  pour Top: 88.5,182.8 88.5,187.8 87.3,189 60.7,189 60.7,169.6 83.3,169.6 83.3,180.2 85.9,182.8
IN3V1  (via drill 0.3, 0.35)
  Top 0.152: v24.6,49.2 24.6,47.45 R11.1 | R10.1 v30.8,56.2 | v17.8,58.8 19.56,58.8 J2.P$9
  Bottom 0.152: v30.8,56.2 30.8,55.4 v24.6,49.2 20.91,49.2 17.22,52.9 17.22,58.22 v17.8,58.8
IN3V2  (via drill 0.3, 0.35)
  Top 0.152: v24.1,79.2 24.1,77.45 R19.1 | R18.1 v30.3,86.2 | v17.3,88.8 19.06,88.8 J3.P$9
  Bottom 0.152: v30.3,86.2 30.3,85.4 v24.1,79.2 20.41,79.2 16.72,82.9 16.72,88.22 v17.3,88.8
IN3V3  (via drill 0.3, 0.35)
  Top 0.152: v24.6,19.2 24.6,17.45 R3.1 | R2.1 v30.8,26.2 | v17.8,28.8 19.56,28.8 J1.P$9
  Bottom 0.152: v30.8,26.2 30.8,25.4 v24.6,19.2 20.91,19.2 17.22,22.9 17.22,28.22 v17.8,28.8
IN3V4  (via drill 0.3, 0.35)
  Top 0.152: v24.1,109.2 24.1,107.45 R27.1 | R26.1 v30.3,116.2 | v17.3,118.8 19.06,118.8 J4.P$9
  Bottom 0.152: v30.3,116.2 30.3,115.4 v24.1,109.2 20.41,109.2 16.72,112.9 16.72,118.22 v17.3,118.8
IN3V5  (via drill 0.3, 0.35)
  Top 0.152: v24.1,139.2 24.1,137.45 R35.1 | R34.1 v30.3,146.2 | v17.3,148.8 19.06,148.8 J5.P$9
  Bottom 0.152: v30.3,146.2 30.3,145.4 v24.1,139.2 20.41,139.2 16.72,142.9 16.72,148.22 v17.3,148.8
IN3V6  (via drill 0.3, 0.35)
  Top 0.152: v24.1,169.2 24.1,167.45 R43.1 | R42.1 v30.3,176.2 | v17.3,178.8 19.06,178.8 J6.P$9
  Bottom 0.152: v30.3,176.2 30.3,175.4 v24.1,169.2 20.41,169.2 16.72,172.9 16.72,178.22 v17.3,178.8
ISCL
  Top 0.152: U$3.19 68.42,35.67 R7.2 70.95,38.2 82.2,38.2 82.8,37.6 U$2.PAD8
ISCL1
  Top 0.152: U$8.19 68.42,65.67 R15.2 70.95,68.2 82.2,68.2 82.8,67.6 U$7.PAD8
ISCL2
  Top 0.152: U$12.19 67.92,95.67 R23.2 70.45,98.2 81.7,98.2 82.3,97.6 U$11.PAD8
ISCL3
  Top 0.152: U$16.19 67.92,125.67 R31.2 70.45,128.2 81.7,128.2 82.3,127.6 U$15.PAD8
ISCL4
  Top 0.152: U$20.19 67.92,155.68 R39.2 70.45,158.2 81.7,158.2 82.3,157.6 U$19.PAD8
ISCL5
  Top 0.152: U$24.19 67.92,185.68 R47.2 70.45,188.2 81.7,188.2 82.3,187.6 U$23.PAD8
ISDA
  Top 0.152: U$3.18 68.1,35.02 68.41,35.33 69.68,35.33 R8.2 70.6,35.92 71.33,35.2 71.33,30.7 69.87,29.24 69.87,25.76 71.83,23.8 77.8,23.8 U$2.PAD1
ISDA1
  Top 0.152: U$8.18 68.1,65.03 68.41,65.33 69.68,65.33 R16.2 70.6,65.92 71.33,65.19 71.33,60.7 69.87,59.24 69.87,55.76 71.83,53.8 77.8,53.8 U$7.PAD1
ISDA2
  Top 0.152: U$12.18 67.6,95.03 67.91,95.33 69.18,95.33 R24.2 70.1,95.92 70.83,95.19 70.83,90.69 69.37,89.24 69.37,85.76 71.33,83.8 77.3,83.8 U$11.PAD1
ISDA3
  Top 0.152: U$16.18 67.6,125.03 67.91,125.33 69.18,125.33 R32.2 70.1,125.92 70.83,125.19 70.83,120.69 69.37,119.24 69.37,115.76 71.33,113.8 77.3,113.8 U$15.PAD1
ISDA4
  Top 0.152: U$20.18 67.6,155.03 67.91,155.33 69.18,155.33 R40.2 70.1,155.92 70.83,155.19 70.83,150.69 69.37,149.24 69.37,145.76 71.33,143.8 77.3,143.8 U$19.PAD1
ISDA5
  Top 0.152: U$24.18 67.6,185.03 67.91,185.33 69.18,185.33 R48.2 70.1,185.92 70.83,185.19 70.83,180.69 69.37,179.24 69.37,175.76 71.33,173.8 77.3,173.8 U$23.PAD1
N$1  (via drill 4.2 pad 6)
  other vias: 73.5,27.5
N$2
  Top 0.152: U$2.PAD4 85.1,23.8 86.3,22.6 90.8,22.6 93.4,25.2 U$1.PIN
N$3
  Top 0.152: R4.1 68.85,32.4 68.85,31.1 R5.2
N$4  (via drill 4.2 pad 6)
  other vias: 73.5,57.5
N$5
  Top 0.152: C12.1 34.81,63.97 U$5.4
N$6
  Top 0.152: C8.1 34.81,33.97 U$4.4
N$7
  Top 0.152: U$7.PAD4 85.1,53.8 86.3,52.6 90.8,52.6 93.4,55.2 U$6.PIN
N$8
  Top 0.152: R12.1 68.85,62.4 68.85,61.1 R13.2
N$9  (via drill 4.2 pad 6)
  other vias: 73,87.5
N$10
  Top 0.152: C22.1 34.31,93.97 U$9.4
N$11
  Top 0.152: U$11.PAD4 84.6,83.8 85.8,82.6 90.3,82.6 92.9,85.2 U$10.PIN
N$12
  Top 0.152: R20.1 68.35,92.4 68.35,91.1 R21.2
N$13  (via drill 4.2 pad 6)
  other vias: 73,117.5
N$14
  Top 0.152: C32.1 34.31,123.97 U$13.4
N$15
  Top 0.152: U$15.PAD4 84.6,113.8 85.8,112.6 90.3,112.6 92.9,115.2 U$14.PIN
N$16
  Top 0.152: R28.1 68.35,122.4 68.35,121.1 R29.2
N$17  (via drill 4.2 pad 6)
  other vias: 73,147.5
N$18
  Top 0.152: C42.1 34.31,153.97 U$17.4
N$19
  Top 0.152: U$19.PAD4 84.6,143.8 85.8,142.6 90.3,142.6 92.9,145.2 U$18.PIN
N$20
  Top 0.152: R36.1 68.35,152.4 68.35,151.1 R37.2
N$21  (via drill 4.2 pad 6)
  other vias: 73,177.5
N$22
  Top 0.152: C52.1 34.31,183.97 U$21.4
N$23
  Top 0.152: U$23.PAD4 84.6,173.8 85.8,172.6 90.3,172.6 92.9,175.2 U$22.PIN
N$24
  Top 0.152: R44.1 68.35,182.4 68.35,181.1 R45.2
PG
  pour Top (no thermals): 84.4,19.6 84.4,30 86.6,32.2 97.6,32.2 98.8,31 98.8,19.8 97,18 86,18
PG1
  pour Top (no thermals): 84.4,49.6 84.4,60 86.6,62.2 97.6,62.2 98.8,61 98.8,49.8 97,48 86,48
PG2
  pour Top (no thermals): 83.9,79.6 83.9,90 86.1,92.2 97.1,92.2 98.3,91 98.3,79.8 96.5,78 85.5,78
PG3
  pour Top (no thermals): 83.9,109.6 83.9,120 86.1,122.2 97.1,122.2 98.3,121 98.3,109.8 96.5,108 85.5,108
PG4
  pour Top (no thermals): 83.9,139.6 83.9,150 86.1,152.2 97.1,152.2 98.3,151 98.3,139.8 96.5,138 85.5,138
PG5
  pour Top (no thermals): 83.9,169.6 83.9,180 86.1,182.2 97.1,182.2 98.3,181 98.3,169.8 96.5,168 85.5,168
SCL  (via drill 0.3)
  Top 0.152: J1.P$2 27.28,21.82 27.28,17.42 | 27.28,17.42 27.28,16.42 27.6,16.1 27.6,16.09 29,16.09 29.36,16.46 U3.6 30.12,18.28 30.12,18.54 31.78,20.2 42,20.2 v51.8,30 | R3.2 27.26,17.4 27.28,17.42 | v58.8,35.6 56.87,35.6 U$3.2
  Bottom 0.152: v51.8,30 57.4,35.6 v58.8,35.6
SCL1  (via drill 0.3)
  Top 0.152: J2.P$2 27.28,51.82 27.28,47.42 | 27.28,47.42 27.28,46.42 27.6,46.1 27.6,46.09 29,46.09 29.36,46.46 U1.6 30.12,48.28 30.12,48.54 31.78,50.2 42,50.2 v51.8,60 | R11.2 27.26,47.4 27.28,47.42 | v58.8,65.6 56.87,65.6 U$8.2
  Bottom 0.152: v51.8,60 57.4,65.6 v58.8,65.6
SCL2  (via drill 0.3)
  Top 0.152: J3.P$2 26.78,81.82 26.78,77.42 | 26.78,77.42 26.78,76.42 27.1,76.1 27.1,76.09 28.5,76.09 28.86,76.46 U2.6 29.62,78.28 29.62,78.54 31.28,80.2 41.5,80.2 v51.3,90 | R19.2 26.76,77.4 26.78,77.42 | v58.3,95.6 56.37,95.6 U$12.2
  Bottom 0.152: v51.3,90 56.9,95.6 v58.3,95.6
SCL3  (via drill 0.3)
  Top 0.152: J4.P$2 26.78,111.82 26.78,107.42 | 26.78,107.42 26.78,106.42 27.1,106.1 27.1,106.09 28.5,106.09 28.86,106.46 U4.6 29.62,108.28 29.62,108.54 31.28,110.2 41.5,110.2 v51.3,120 | R27.2 26.76,107.4 26.78,107.42 | v58.3,125.6 56.37,125.6 U$16.2
  Bottom 0.152: v51.3,120 56.9,125.6 v58.3,125.6
SCL4  (via drill 0.3)
  Top 0.152: J5.P$2 26.78,141.82 26.78,137.42 | 26.78,137.42 26.78,136.42 27.1,136.1 27.1,136.09 28.5,136.09 28.86,136.46 U5.6 29.62,138.28 29.62,138.54 31.28,140.2 41.5,140.2 v51.3,150 | R35.2 26.76,137.4 26.78,137.42 | v58.3,155.6 56.37,155.6 U$20.2
  Bottom 0.152: v51.3,150 56.9,155.6 v58.3,155.6
SCL5  (via drill 0.3)
  Top 0.152: J6.P$2 26.78,171.82 26.78,167.42 | 26.78,167.42 26.78,166.42 27.1,166.1 27.1,166.09 28.5,166.09 28.86,166.46 U6.6 29.62,168.28 29.62,168.54 31.28,170.2 41.5,170.2 v51.3,180 | R43.2 26.76,167.4 26.78,167.42 | v58.3,185.6 56.37,185.6 U$24.2
  Bottom 0.152: v51.3,180 56.9,185.6 v58.3,185.6
SDA  (via drill 0.3)
  Top 0.152: R2.2 27.72,26.23 J1.P$3 27.58,24.06 27.58,21.46 28.02,21.02 28.02,17.6 U3.5 28.85,18.28 28.85,18.54 31.11,20.8 v40.8,20.8 | v54.8,35.11 54.88,35.02 U$3.3
  Bottom 0.152: v40.8,20.8 54.8,34.8 v54.8,35.11
SDA1  (via drill 0.3)
  Top 0.152: R10.2 27.72,56.23 J2.P$3 27.58,54.06 27.58,51.46 28.02,51.02 28.02,47.6 U1.5 28.85,48.28 28.85,48.54 31.11,50.8 v40.8,50.8 | v54.8,65.11 54.88,65.03 U$8.3
  Bottom 0.152: v40.8,50.8 54.8,64.8 v54.8,65.11
SDA2  (via drill 0.3)
  Top 0.152: R18.2 27.22,86.23 J3.P$3 27.08,84.06 27.08,81.46 27.52,81.02 27.52,77.6 U2.5 28.35,78.28 28.35,78.54 30.61,80.8 v40.3,80.8 | v54.3,95.11 54.38,95.03 U$12.3
  Bottom 0.152: v40.3,80.8 54.3,94.8 v54.3,95.11
SDA3  (via drill 0.3)
  Top 0.152: R26.2 27.22,116.23 J4.P$3 27.08,114.06 27.08,111.46 27.52,111.02 27.52,107.6 U4.5 28.35,108.28 28.35,108.54 30.61,110.8 v40.3,110.8 | v54.3,125.11 54.38,125.03 U$16.3
  Bottom 0.152: v40.3,110.8 54.3,124.8 v54.3,125.11
SDA4  (via drill 0.3)
  Top 0.152: R34.2 27.22,146.23 J5.P$3 27.08,144.06 27.08,141.46 27.52,141.02 27.52,137.6 U5.5 28.35,138.28 28.35,138.54 30.61,140.8 v40.3,140.8 | v54.3,155.11 54.38,155.03 U$20.3
  Bottom 0.152: v40.3,140.8 54.3,154.8 v54.3,155.11
SDA5  (via drill 0.3)
  Top 0.152: R42.2 27.22,176.23 J6.P$3 27.08,174.06 27.08,171.46 27.52,171.02 27.52,167.6 U6.5 28.35,168.28 28.35,168.54 30.61,170.8 v40.3,170.8 | v54.3,185.11 54.38,185.03 U$24.3
  Bottom 0.152: v40.3,170.8 54.3,184.8 v54.3,185.11
UNREG
  Top 0.406: J1.P$7 19.59,35.59 21,37 39,37 41,35 41,32 40,31 38.23,31 U$4.1
UNREG1
  Top 0.406: J2.P$7 19.59,65.59 21,67 39,67 41,65 41,62 40,61 38.23,61 U$5.1
UNREG2
  Top 0.406: J3.P$7 19.09,95.59 20.5,97 38.5,97 40.5,95 40.5,92 39.5,91 37.73,91 U$9.1
UNREG3
  Top 0.406: J4.P$7 19.09,125.59 20.5,127 38.5,127 40.5,125 40.5,122 39.5,121 37.73,121 U$13.1
UNREG4
  Top 0.406: J5.P$7 19.09,155.59 20.5,157 38.5,157 40.5,155 40.5,152 39.5,151 37.73,151 U$17.1
UNREG5
  Top 0.406: J6.P$7 19.09,185.59 20.5,187 38.5,187 40.5,185 40.5,182 39.5,181 37.73,181 U$21.1
VSEL
  Top 0.152: R4.2 67.22,32.6 66.37,31.75 65.1,31.75 65.07,31.77 U$3.13 62.17,31.77 61.8,31.4 61.8,29.15 R6.1
VSEL1
  Top 0.152: R12.2 67.22,62.6 66.37,61.75 65.1,61.75 65.07,61.77 U$8.13 62.17,61.77 61.8,61.4 61.8,59.15 R14.1
VSEL2
  Top 0.152: R20.2 66.72,92.6 65.87,91.75 64.6,91.75 64.57,91.78 U$12.13 61.67,91.78 61.3,91.4 61.3,89.15 R22.1
VSEL3
  Top 0.152: R28.2 66.72,122.6 65.87,121.75 64.6,121.75 64.57,121.78 U$16.13 61.67,121.78 61.3,121.4 61.3,119.15 R30.1
VSEL4
  Top 0.152: R36.2 66.72,152.6 65.87,151.75 64.6,151.75 64.57,151.78 U$20.13 61.67,151.78 61.3,151.4 61.3,149.15 R38.1
VSEL5
  Top 0.152: R44.2 66.72,182.6 65.87,181.75 64.6,181.75 64.57,181.78 U$24.13 61.67,181.78 61.3,181.4 61.3,179.15 R46.1

## Text on the board
Top: DARWIN + WATER QUALITY MODULE + PA1